# Altium PCB test.PcbDoc
Units mil, origin at the board's own origin, x right, y up, seen from the top; angles counter-clockwise.
Board outline 6000 x 4000 mil, 2 copper layers (Top Layer, Bottom Layer); 2 components, 2 nets, 20 pads, 0 vias.
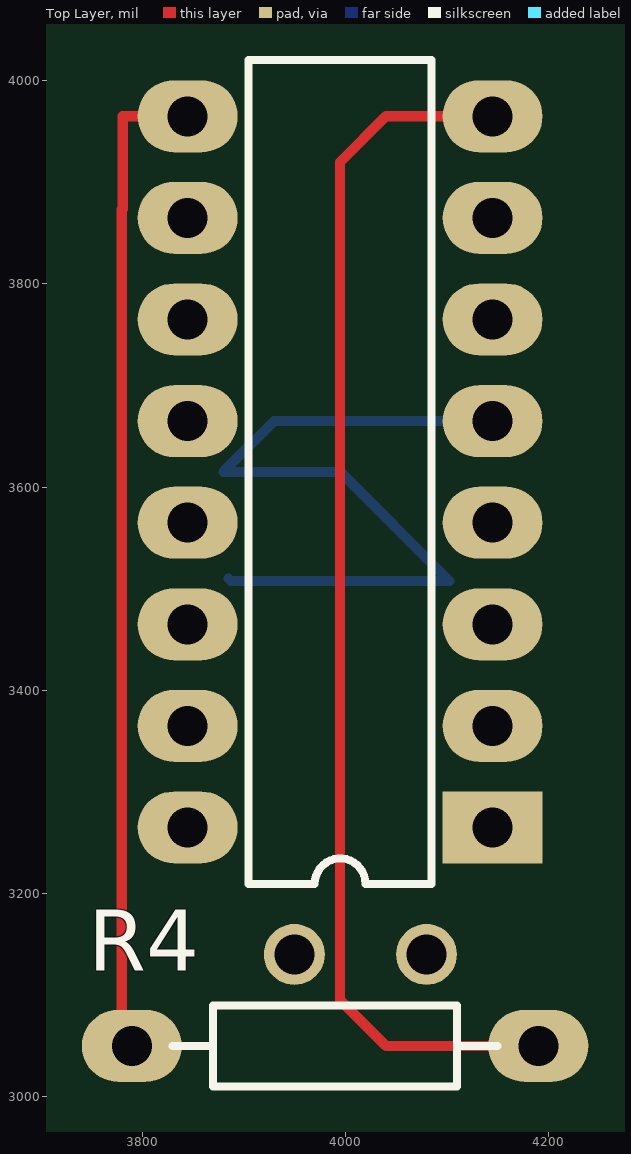
[diagram p0: Top Layer view]
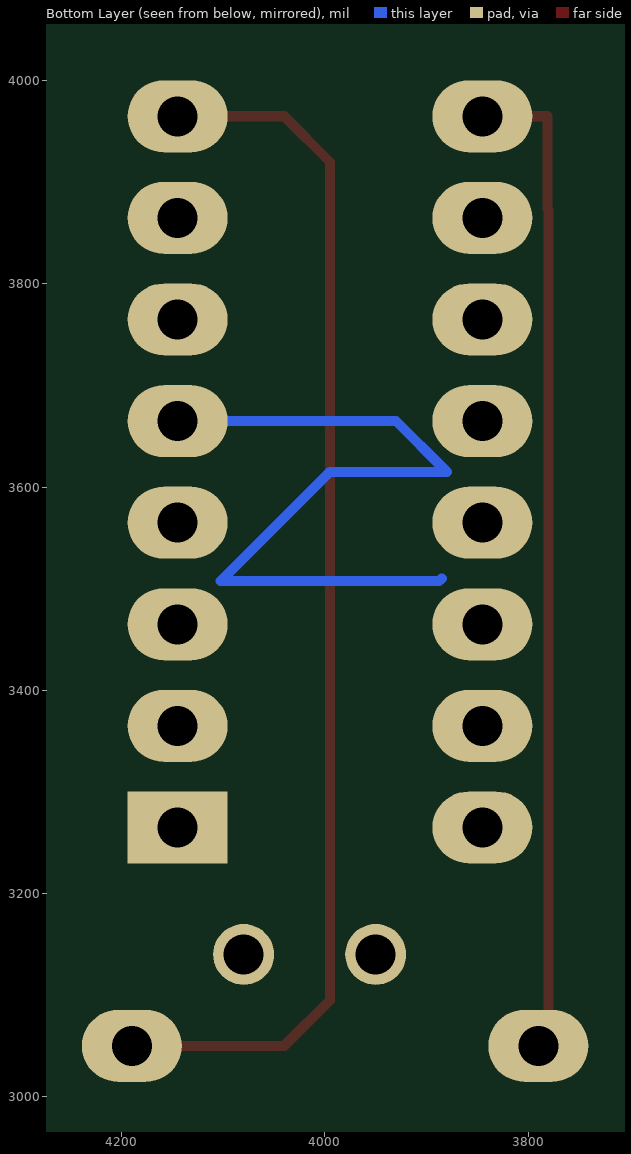
[diagram p1: Bottom Layer view, seen from below]

## Layer stack, top to bottom
Top Solder: solder mask 0.4, Solder Resist, Dk 3.5
Top Layer: signal copper 1.4
Dielectric 1: dielectric 12.6, FR-4, Dk 4.8
Bottom Layer: signal copper 1.4
Bottom Solder: solder mask 0.4, Solder Resist, Dk 3.5

## Board outline
1000,1000 7000,1000 7000,5000 1000,5000

## Design rules (kind name [scope] priority, off if disabled: settings)
Clearance [All] p1: gap=10
PolygonConnect [All] p1: connectstyle=Relief reliefconductorwidth=10 reliefentries=4 polygonreliefangle="90 Angle" airgapwidth=10
RoutingVias [All] p1: holewidth=28 width=50 viastyle="Through Hole" minholewidth=28 minwidth=50 maxholewidth=28 maxwidth=50
SolderMaskExpansion [All] p1: expansion=4
UnpouredPolygon [All] p1: allowunpoured=FALSE
Width [All] p1: maxlimit=10 minlimit=10 preferedwidth=10
29 further rules are at their usual default settings.

## Components (designator, comment, footprint, x,y, rotation, side; value= is the part's Value field where it differs from the comment)
* "74HC257" DIP16_LGE1.0 3995,3615 r90 top
R4 "G-Res" Res10mm_LGE1.0 3990,3050 r180 top

## Footprints (in the part's own frame and the unit in brackets; to place one, negate y for a bottom-side part, rotate by r counter-clockwise, add the part's x,y. Pads: shape width x height; smd on the part's side, far side on the other; paste and mask are expansions set on the pad)
DIP16_LGE1.0 [mm] "DIP; 16 Leads; Row Spacing 7.62 mm; Pitch 2.54 mm"
  rect 1.8x2.5 hole 1: 1(-8.89,-3.81)
  oval 1.8x2.5 hole 1: 2(-6.35,-3.81) 3(-3.81,-3.81) 4(-1.27,-3.81) 5(1.27,-3.81) 6(3.81,-3.81) 7(6.35,-3.81) 8(8.89,-3.81) 9(8.89,3.81) 10(6.35,3.81) 11(3.81,3.81) 12(1.27,3.81) 13(-1.27,3.81) 14(-3.81,3.81) 15(-6.35,3.81) 16(-8.89,3.81)
  silkscreen extent -10.3,-2.29 10.3,2.29
Res10mm_LGE1.0 [mm] "Axial Device, Thru-Hole; 2 Leads; 0.4 in Pin Spacing"
  oval 2.5x1.8 hole 1: 1(-5.08,0) 2(5.08,0)
  silkscreen extent -4.06,-1.02 4.06,1.02

## Part data
R4: "resistor (specify value)"

## Free pads (board coordinates)
  round 60 hole 39.37: 0(3950,3140) 1(4080,3140)

## Nets (pads, with @x,y where several pads share a name; then routed paths per layer and width w, separated by ;. In a path a pad name is that pad's centre, name@x,y a point inside that pad or via, vN(x,y) a via of type N, cw(c..) or ccw(c..) an arc to the next point about the centre after c; other vN are vias at no path point)
Net*_8: *.8 R4.1 | length 1207.3
  Top Layer w10: *.8 4040,3965 3995,3920 3995,3095 4040,3050 R4.1
Net*_9: *.9 R4.2 | length 989.4
  Top Layer w10: R4.2 3780,3050 3780,3873 3781,3874 3781,3965 *.9
pads on no net: *.1 *.2 *.3 *.4 *.5 *.6 *.7 *.10 *.11 *.12 *.13 *.14 *.15 *.16
copper on no net: | length 770.9
  Bottom Layer w10: 3885.05,3510.05 3887.55,3507.55 4102.45,3507.55 3995,3615 3880.1,3615 3882.55,3617.45 3930.1,3665 4145,3665

## Silkscreen, mask and mechanical layers (free items; w line width, h text height)
Mechanical 1:
  lines w10: 3710,2970 4310,2970 4310,4070 4155,4200 3855,4200 3710,4070 3710,2970